# Altium PCB sitiboard.PcbDoc (part 2 of 2)
Units mm, origin at the board's own origin, x right, y up, seen from the top; angles counter-clockwise.
Board outline 72 x 45 mm, 2 copper layers (Top Layer, Bottom Layer), stack 1.57 mm thick; 60 components, 63 nets, 238 pads, 62 vias.
Unrouted connection lines stored in the file: 20.
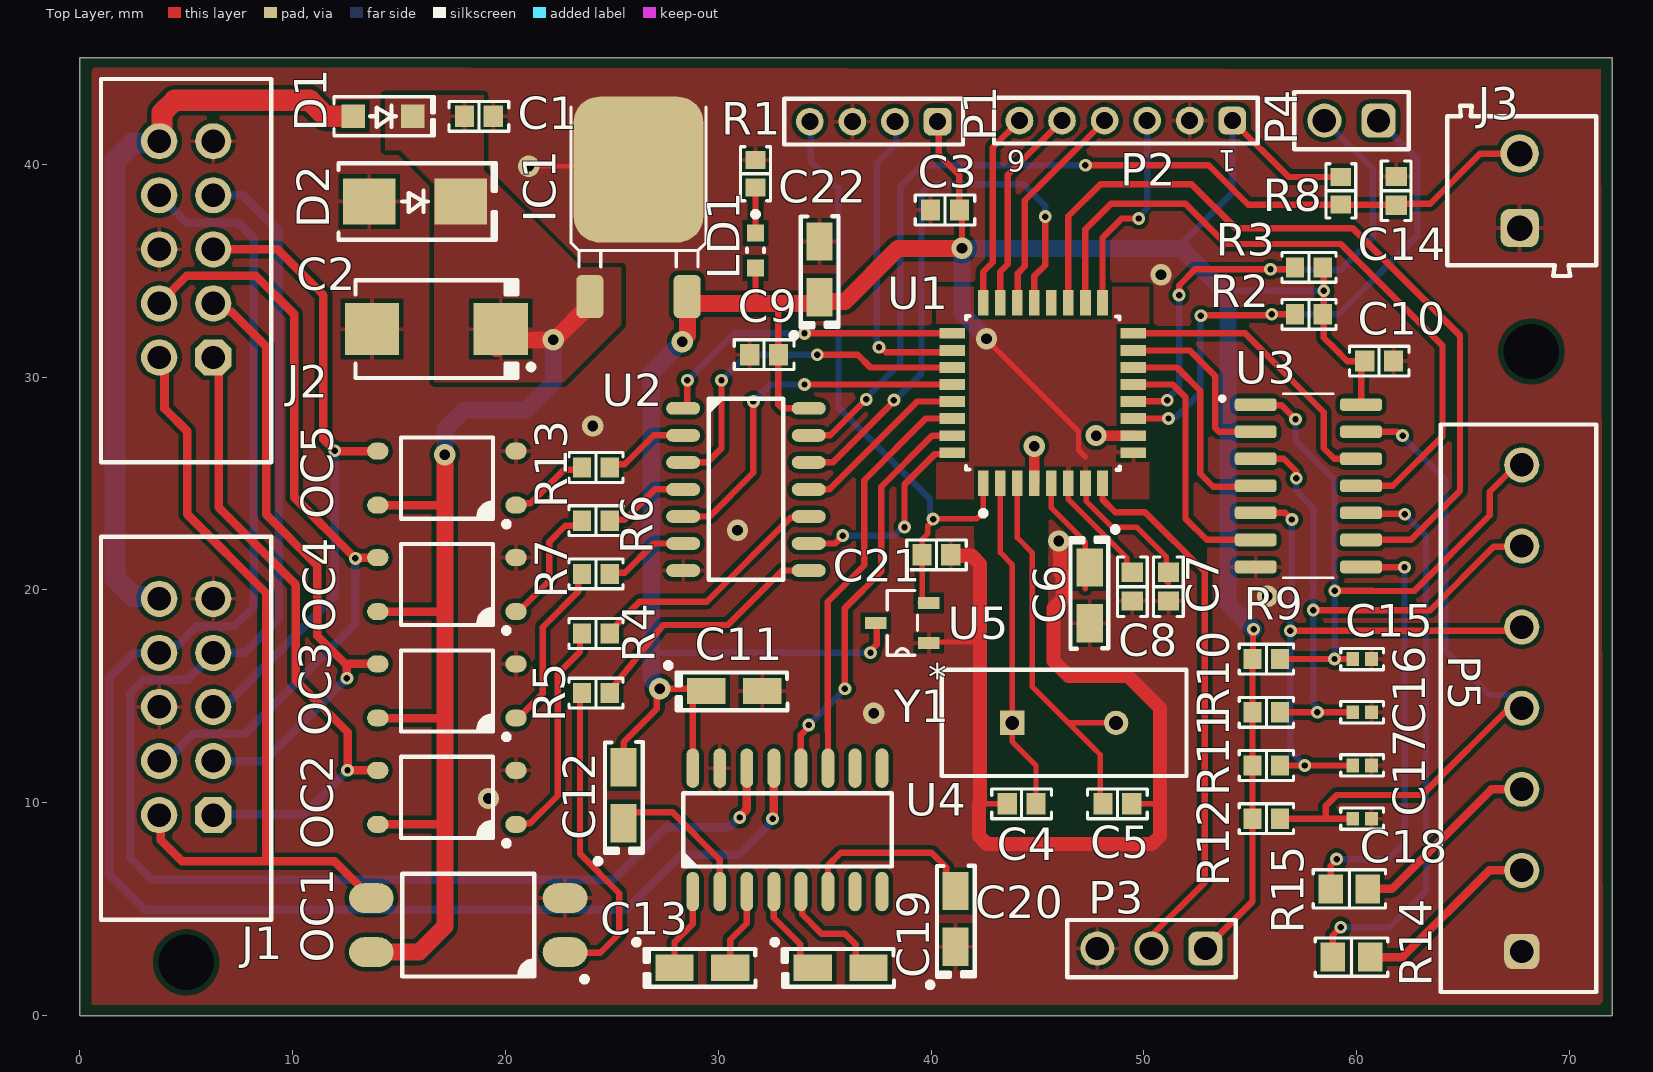
[diagram p0: Top Layer view]

## Via types
v1: diameter 0.6, hole 0.3, Top Layer to Bottom Layer, tented both sides, 46 vias
v2: diameter 1, hole 0.5, Top Layer to Bottom Layer, tented both sides, 16 vias

## Nets (pads, with @x,y where several pads share a name; then routed paths per layer and width w, separated by ;. In a path a pad name is that pad's centre, name@x,y a point inside that pad or via, vN(x,y) a via of type N, cw(c..) or ccw(c..) an arc to the next point about the centre after c; other vN are vias at no path point) (continued)
Start_: (continued)
  Top Layer w0.3: U2.1 28.411,28.53 28.55,28.669 v1(28.55,29.85) ; v1(34.05,32.05) U1.25
  Bottom Layer w0.3: v1(28.55,29.85) 30.75,32.05 v1(34.05,32.05)
SWIM: P1.2 U1.26 | length 14.6
  Top Layer w0.3: v1(37.55,31.4) 37.631,31.4 37.874,31.157 40.907,31.157 U1.26
  Bottom Layer w0.3: v1(37.55,31.4) 37.493,31.457 37.493,31.67 37.45,31.712 37.45,40.05 38.35,40.95 P1.2@38.35,41.95
TX1out: J1.7 J2.7 U4.14 | length 70.4
  Top Layer w0.4: v1(31.006,9.306) 31.006,9.36 31.342,9.696 U4.14
  Bottom Layer w0.4: J1.7 6.27,16.98 5.065,15.775 3,15.775 2.375,15.15 2.375,7.4 3.4,6.375 25.05,6.375 27.525,8.85 30.506,8.85 30.961,9.306 v1(31.006,9.306) ; J2.7 7.66,38.54 9.35,36.85 9.35,18.65 7.739,17.039 6.769,17.039 J1.7@6.748,17.018
TX_: U1.30 U4.11 | length 19.6
  Top Layer w0.3: U4.11 35.152,13.348 35.15,13.35 35.15,19.45 36.85,21.15 36.85,25.15 39.75,28.05 U1.30
VCAP: C6.1 U1.5 | length 5.6
  Top Layer w0.254: U1.5 45.65,23.85 47.25,22.25 47.25,20.06
pads on no net: J1. J2. U1.20 U2. U4. U4.7 U4.8 U4.9 U4.10 U4.25

## Polygon pours and split planes (outlines as drawn)
GND on Top Layer "GND_L01_P003" (solid, remove dead copper, pour order 3): 0.55,44.55 71.45,44.45 71.55,0.5 0.55,0.5
+12 on Top Layer "+12_L01_P001" (solid, pour order 1): 14.35,43.25 18.979,43.25 18.979,39.721 23.55,35.15 25.45,35.15 25.45,32.45 22.75,29.75 16.65,29.75 16.65,39.05 15.05,40.65 14.35,40.65
+5 on Top Layer "+5_L01_P000" (solid, remove dead copper, pour order 0): 40.25,34.25 50.25,34.25 50.25,24.25 40.25,24.25
GND on Bottom Layer "GND_L02_P002" (solid, pour order 2): 0.5,44.5 71.5,44.5 71.5,0.5 0.5,0.5

## Other copper
Top Layer:
  pour cut-out: 50.3,27.35 50.35,27.3 51.6,27.3 51.6,23.234 52.841,21.993 52.95,21.993 52.95,21.35 52.9,21.3 50.338,23.862 50.338,23.934
  pour cut-out: 42,24.25 45.5,24.25 45.448,16.952 46.45,15.95 49.25,15.95 50.75,14.45 50.75,8.437 50.363,8.05 42.637,8.05 42.25,8.437

## Silkscreen, mask and mechanical layers (free items; w line width, h text height)
Mechanical 4:
  the board outline again, w0.254

## Text inside footprints (layer, text, board x,y; h text height)
P2: Top Overlay "6" at 44.45,40.65 h1.02 r180; Top Overlay "1" at 54.35,40.65 h1.02 r180
U5: Top Overlay "*" at 40.733,17.078 h1.27 r180; Mechanical 13 "*" at 40.733,17.078 h1.27 r180